# Altium PCB BABA03A_V3.0.0.PcbDoc (part 1 of 2)
Units mil, origin at the board's own origin, x right, y up, seen from the top; angles counter-clockwise.
Board outline 7913.84 x 2796.11 mil, 2 copper layers (Top Layer, Bottom Layer); 189 components, 144 nets, 645 pads, 163 vias.
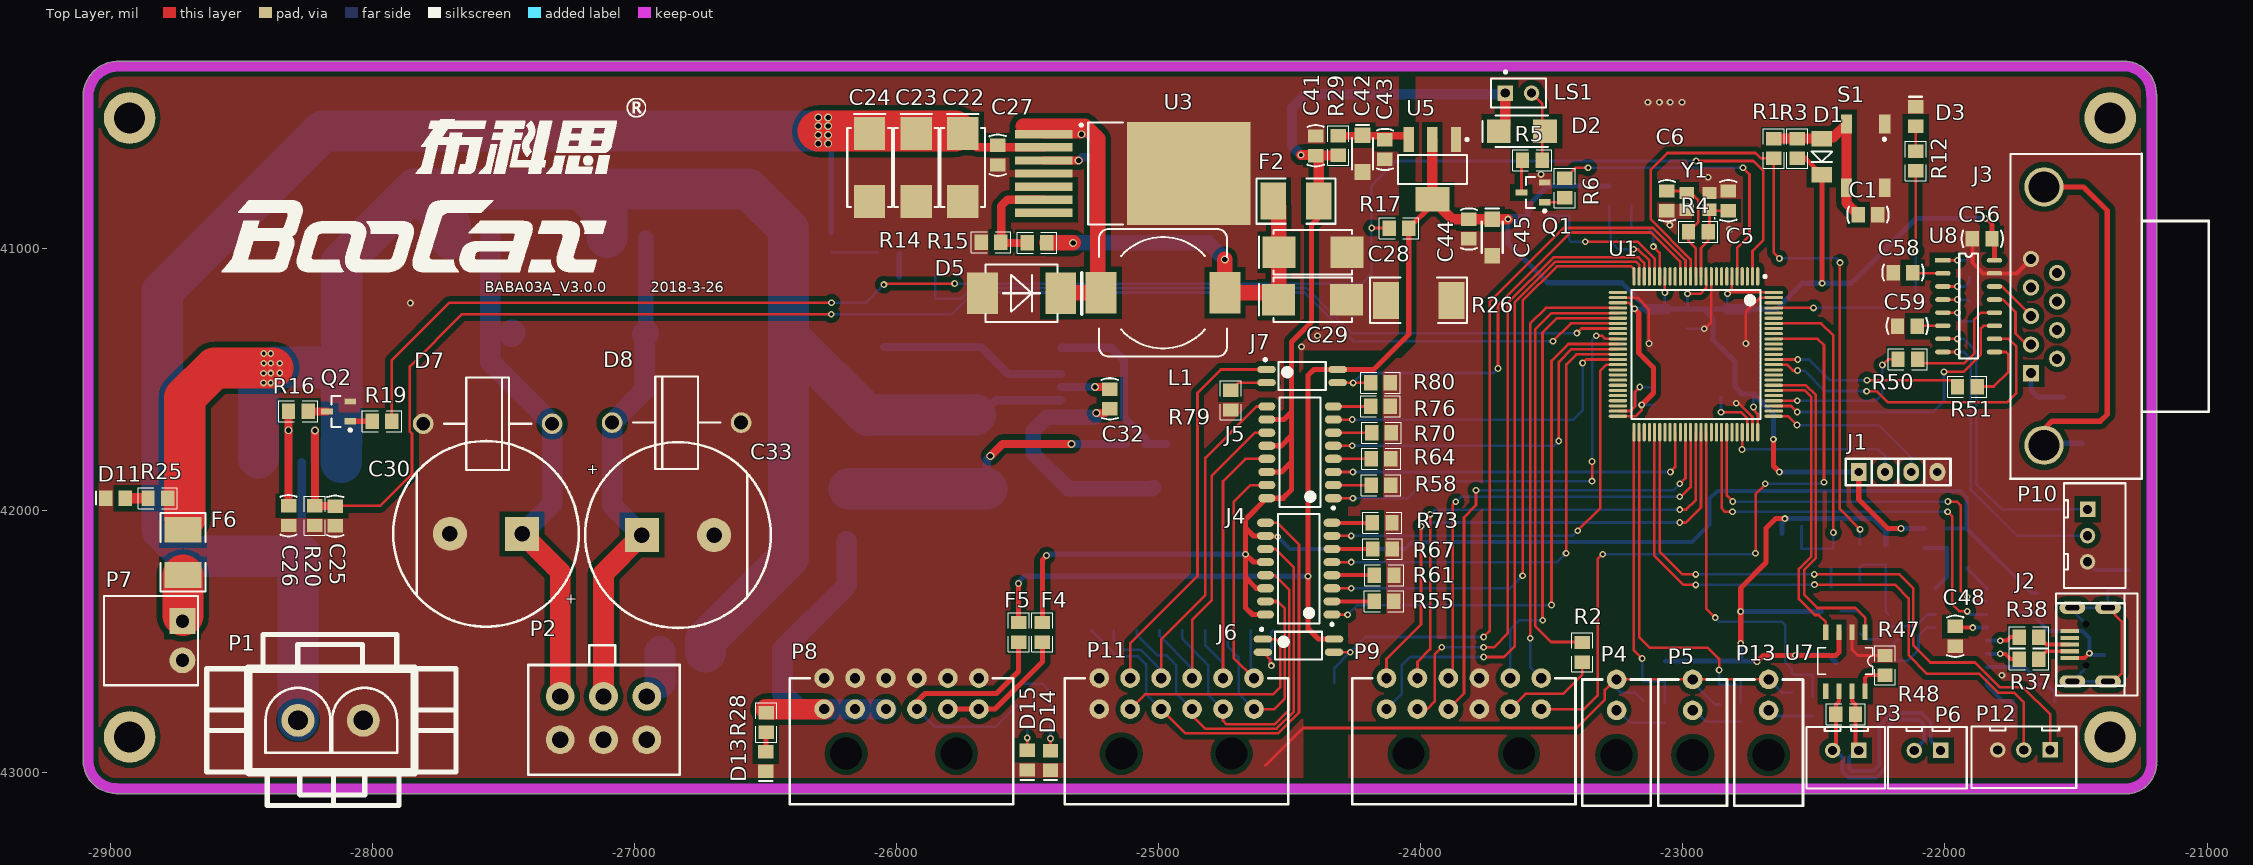
[diagram p0: Top Layer view]
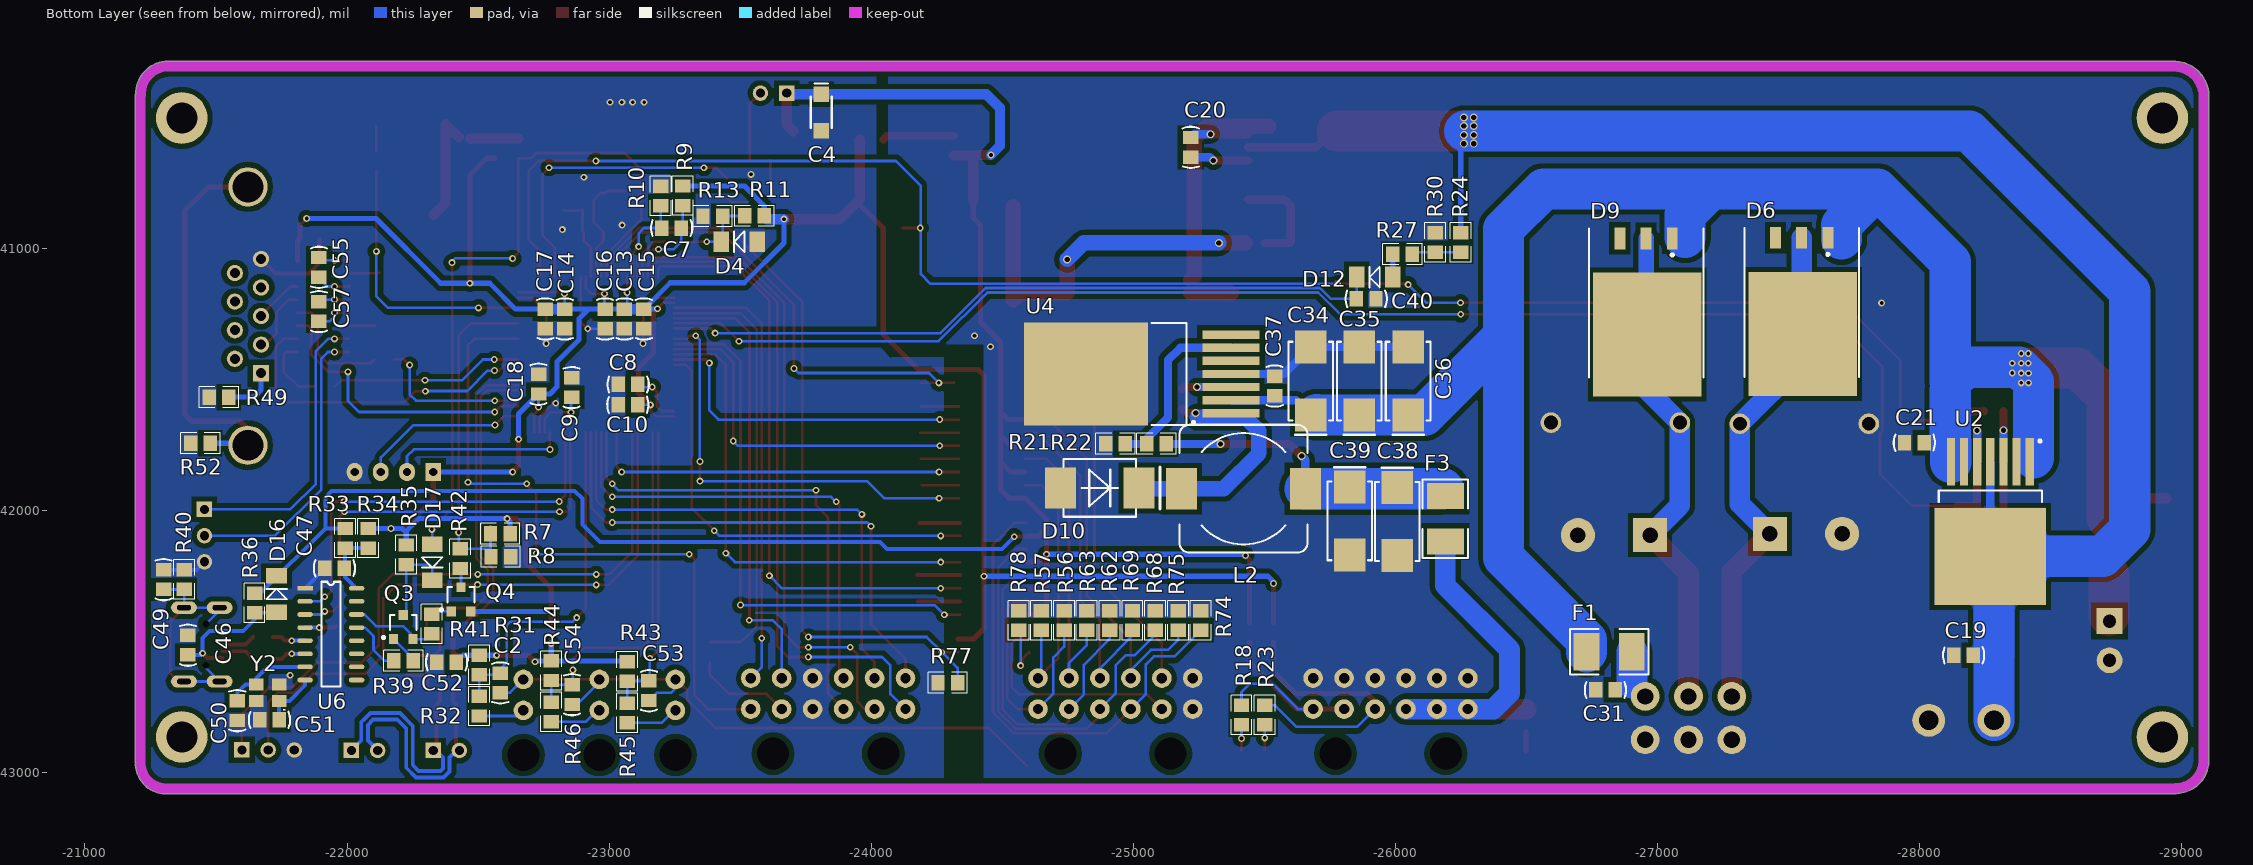
[diagram p1: Bottom Layer view, seen from below]

## Layer stack, top to bottom
Top Solder: solder mask 0.4, Solder Resist, Dk 3.5
Top Layer: signal copper 1.4
Dielectric1: prepreg 12.6, FR-4, Dk 4.8
Bottom Layer: signal copper 1.4
Bottom Solder: solder mask 0.4, Solder Resist, Dk 3.5

## Board outline
-28981.29,-43079.22 cw(c-28979.12,-42952.25) -29106.09,-42950.08 cw(c-29086.39,-42950.42) -29105.7,-42946.52 -29105.7,-40428.26 cw(c-29086.44,-40424.1) -29106.12,-40425.01 cw(c-28971.8,-40418.8) -28967.6,-40284.4 cw(c-28967.11,-40304.09) -28967.11,-40284.39 -21321.75,-40284.39 cw(c-21321.75,-40304.09) -21320.47,-40284.44 cw(c-21316.14,-40303.65) -21315.58,-40283.96 cw(c-21319.16,-40410.22) -21192.85,-40409.15 cw(c-21211.98,-40413.86) -21192.28,-40413.86 -21192.28,-42959.37 cw(c-21211.98,-42959.37) -21192.78,-42963.74 cw(c-21211.98,-42968.11) -21192.28,-42968.11 cw(c-21211.98,-42968.11) -21192.3,-42969 cw(c-21308.64,-42963.74) -21313.9,-43080.07 cw(c-21313.01,-43060.39) -21316.92,-43079.7 -28976.81,-43079.7 cw(c-28976.81,-43060) -28981.12,-43079.22 cw(c-28980.95,-43059.52)

## Design rules (kind name [scope] priority, off if disabled: settings)
Clearance Clearance_1 [InPolygon] p1: gap=20
Clearance poly [InPolygon] p2: gap=7
Clearance U5pintupin [InComponent('U5')] p3: gap=6
Clearance [All] p4: gap=7 except(20: Via-Poly Fill-Poly Poly-Poly)
ComponentClearance [All] p1 off: gap=10 collisioncheckmode=3 verticalgap=10 showdistances=FALSE
DiffPairsRouting [All] p1: maxlimit=10 minlimit=7 mostfreqgap=10 toplayer_minwidth=10 toplayer_maxwidth=15 toplayer_prefwidth=15 bottomlayer_minwidth=10 bottomlayer_maxwidth=15 bottomlayer_prefwidth=15 maxuncoupledlength=500
Height [All] p1: minheight=0 maxheight=2000 prefheight=500
HoleSize [All] p1: absolutevalues=TRUE maxlimit=500 minlimit=1 maxpercent=80.000 minpercent=20.000
HoleToHoleClearance [All] p1: gap=0 allowstackedmicrovias=TRUE
MinimumSolderMaskSliver [All] p1: minsoldermaskwidth=1
PlaneConnect [All] p1: planeconnectstyle=Direct reliefexpansion=20 reliefentries=4 reliefconductorwidth=10 reliefairgap=10
PolygonConnect G [InNet('GND')] p1: connectstyle=Direct reliefconductorwidth=10 reliefentries=4 polygonreliefangle="90 Angle" airgapwidth=10
PolygonConnect NETD4_2 [InNet('NetD4_2')] p2: connectstyle=Direct reliefconductorwidth=10 reliefentries=4 polygonreliefangle="90 Angle" airgapwidth=10
PolygonConnect NETD4 [InNet('NetC13_2')] p3: connectstyle=Direct reliefconductorwidth=10 reliefentries=4 polygonreliefangle="90 Angle" airgapwidth=10
PolygonConnect NETD3_2 [InNet('NetD3_2')] p4: connectstyle=Direct reliefconductorwidth=10 reliefentries=4 polygonreliefangle="90 Angle" airgapwidth=10
PolygonConnect RELAY_IN [InNet('RELAY_IN')] p5: connectstyle=Direct reliefconductorwidth=10 reliefentries=4 polygonreliefangle="90 Angle" airgapwidth=10
PolygonConnect VCC_24V [InNet('VCC_24V')] p6: connectstyle=Direct reliefconductorwidth=10 reliefentries=4 polygonreliefangle="90 Angle" airgapwidth=10
PolygonConnect BATTIN [InNet('BATTIN')] p7: connectstyle=Direct reliefconductorwidth=10 reliefentries=4 polygonreliefangle="90 Angle" airgapwidth=10
PolygonConnect [All] p8: connectstyle=Direct reliefconductorwidth=10 reliefentries=4 polygonreliefangle="90 Angle" airgapwidth=10
RoutingVias [All] p1: holewidth=28 width=40 viastyle="Through Hole" minholewidth=12 minwidth=26 maxholewidth=30 maxwidth=100
SilkToSilkClearance [All] p1: silktosilkclearance=0
SilkToSolderMaskClearance [IsPad] p1: minsilkscreentomaskgap=0 clearancetoexposedcopper=TRUE
SolderMaskExpansion [All] p1: expansion=4
Width [All] p1: maxlimit=500 minlimit=10 preferedwidth=30
Width Width_4 [InNet('VCC_CONTROL')] p2: maxlimit=110 minlimit=90 preferedwidth=100
Width Width_3 [InNet('VCC_B1')] p3: maxlimit=110 minlimit=90 preferedwidth=100
Width Width_2 [InNet('VCC_B')] p4: maxlimit=110 minlimit=90 preferedwidth=100
Width Width_1 [InNet('VCC_ALL')] p5: maxlimit=110 minlimit=90 preferedwidth=100
21 further rules are at their usual default settings.

## Classes and differential pairs
component class POWER: 1 C19 C20 C21 C22 C23 C24 C25 C26 C27 C28 C29 C30 C31 C32 C33 C34 C35 C36 C37 C38 C39 C40 C41 C42 C43 C44 C45 D5 D6 D7 D8 D9 D10 D11 D12 D13 F1 F2 F3 K3 L1 L2 M1 M2 M4 P1 P2 Q2 R14 R15 R16 R17 R19 R20 R21 R22 R24 R25 R26 R27 R28 R29 R30 U2 U3 U4 U5
component class MCU: C1 C4 C5 C6 C7 C8 C9 C10 C13 C14 C15 C16 C17 C18 D1 D2 D3 D4 J1 LS1 Q1 R1 R2 R3 R4 R5 R6 R7 R8 R9 R10 R11 R12 R13 S1 U1 Y1
component class CONNECTOR: C46 C47 C48 C49 C50 C51 C52 C53 C54 C55 C56 C57 C58 C59 D14 D15 D16 D17 F4 F5 F6 J2 J3 J8 J9 J10 P3 P4 P5 P6 P7 P8 P9 P10 P12 P13 Q3 Q4 R18 R23 R31 R32 R33 R34 R35 R36 R37 R38 R39 R40 R41 R42 R43 R44 R45 R46 R47 R48 R49 R50 R51 R52 U6 U7 U8 Y2 Z1 Z2
component class "Motor Control": J4 J5 J6 J7 J*1 P11 R55 R56 R57 R58 R61 R62 R63 R64 R67 R68 R69 R70 R73 R74 R75 R76 R77 R78 R79 R80
differential pair CAN: +CAN_P -CAN_N
differential pair OSC_16: +OSC_16_P -OSC_16_N
differential pair USB: +USB_P -USB_N

## Components (designator, comment, footprint, x,y, rotation, side; value= is the part's Value field where it differs from the comment)
C1 "Cap" C0805 -22294,-40870 r180 top
C2 "Cap" C0805 -22585,-42657 r270 bottom
C4 "Cap Pol1" CAP-1206 -23810,-40480 r270 bottom
C5 "Cap" C0805 -22827.12,-40817 r270 top
C6 "Cap" C0805 -23061.12,-40817 r270 top
C7 "Cap" C0805 -23239,-40921 r180 bottom
C8 "Cap" C0805 -23073,-41518 r0 bottom
C9 "Cap" C0805 -22857,-41530 r90 bottom
C10 "Cap" C0805 -23072,-41596 r0 bottom
C13 "Cap" C0805 -23059,-41268 r270 bottom
C14 "Cap" C0805 -22831,-41268 r270 bottom
C15 "Cap" C0805 -23133,-41268 r270 bottom
C16 "Cap" C0805 -22985,-41268 r270 bottom
C17 "Cap" C0805 -22757,-41268 r270 bottom
C18 "Cap" C0805 -22731,-41517 r90 bottom
C19 "Cap" C0805 -28170,-42552 r180 bottom
C20 "Cap" C0805 -25220.55,-40612.99 r270 bottom
C21 "Cap" C0805 -27982,-41740 r180 bottom
C22 "CIN" CAP-7343 -25749,-40690 r270 top
C23 "CIN" CAP-7343 -25926.87,-40690 r270 top
C24 "CIN" CAP-7343 -26104.75,-40690 r270 top
C25 "Cap" C0805 -28144,-42020.6 r270 top
C26 "Cap" C0805 -28322,-42019 r270 top
C27 "Cap" C0805 -25615.55,-40642.99 r90 top
C28 "CIN" CAP-7343 -24412.55,-41013.99 r0 top
C29 "CIN" CAP-7343 -24413.55,-41193.99 r0 top
C30 "Cap Pol1" CTH-R9-D7 -27430.41,-42088 r180 top
C31 "Cap" C0805 -26803,-42684 r0 bottom
C32 "Cap" C0805 -25187.55,-41572.99 r90 top
C33 "Cap Pol1" CTH-R9-D7 -26973.59,-42093 r0 top
C34 "CIN" CAP-7343 -25678.55,-41504.99 r90 bottom
C35 "CIN" CAP-7343 -25864.05,-41504.99 r90 bottom
C36 "CIN" CAP-7343 -26049.55,-41504.99 r90 bottom
C37 "Cap" C0805 -25540.55,-41523.99 r270 bottom
C38 "CIN" CAP-7343 -26008.55,-42040.99 r270 bottom
C39 "CIN" CAP-7343 -25827.55,-42038.99 r270 bottom
C40 "Cap" C0805 -25890,-41191 r0 bottom
C41 "Cap" C0805 -24402,-40607 r270 top
C42 "Cap Pol1" CAP-1206 -24223,-40637 r270 top
C43 "Cap" C0805 -24137.55,-40620.99 r90 top
C44 "Cap" C0805 -23817,-40924.6 r90 top
C45 "Cap Pol1" CAP-1206 -23728,-40957 r270 top
C46 "Cap" C0805 -21393,-42513 r90 bottom
C47 "Cap" C0805 -21952,-42219 r0 bottom
C48 "Cap" C0805 -21961,-42479 r270 top
C49 "Cap" C0805 -21300,-42263 r90 bottom
C50 "Cap" C0805 -21581,-42763 r270 bottom
C51 "Cap" C0805 -21704,-42798 r0 bottom
C52 "Cap" C0805 -22380,-42578 r180 bottom
C53 "Cap" C0805 -23152.55,-42686.99 r270 bottom
C54 "Cap" C0805 -22859,-42702 r270 bottom
C55 "Cap" C0805 -21893,-41071 r270 bottom
C56 "Cap" C0805 -21858,-40962 r0 top
C57 "Cap" C0805 -21893,-41240 r270 bottom
C58 "Cap" C0805 -22160.4,-41091 r0 top
C59 "Cap" C0805 -22144,-41295 r0 top
D1 "Diode" DIODE-1206 -22470,-40580.21 r270 top
D2 "Diode-Schottky" DIODE-SMA -23615,-40552 r180 top
D3 "LED0" LED_0805 -22112,-40495 r90 top
D4 "Diode-Z" DIODE-1206 -23566,-40973 r0 bottom
D5 "D Schottky" DIODE-SMC -25524.55,-41169.99 r0 top
D6 "MBR30100" TO-263-3 -27551.91,-41125 r0 bottom
D7 "TVS" DIODE -27808.13,-41668 r0 top
D8 "TVS" DIODE -26594.87,-41664 r180 top
D9 "MBR30100" TO-263-3 -26958,-41127 r0 bottom
D10 "D Schottky" DIODE-SMC -24872.95,-41912.99 r180 bottom
D11 "LED0" LED_0805 -28982,-41952 r180 top
D12 "Diode-Z" DIODE-1206 -25991,-41108 r0 bottom
D13 "LED0" LED_0805 -26500.75,-42957.08 r270 top
D14 "LED0" LED_0805 -25414,-42953 r270 top
D15 "LED0" LED_0805 -25503,-42952 r270 top
D16 "Diode" DIODE-1206 -21731,-42386.79 r90 bottom
D17 "Diode" DIODE-1206 -22325,-42128.21 r270 bottom
F1 "Fuse" 1812 -26817,-42538 r0 bottom
F2 "Fuse" 1812 -24477,-40818 r0 top
F3 "Fuse" 1812 -26192,-42030.61 r270 bottom
F4 "Fuse" 0805-1 -25445,-42464 r90 top
F5 "Fuse" 0805-1 -25536,-42464 r90 top
F6 "Fuse" 1812 -28725,-42159 r90 top
J1 "JTAG" PORT-SIP4-2.54 -22279,-41852 r0 top
J2 "USB-MICRO" USB-MICRO-1 -21445.91,-42510.75 r90 top
J3 "DB9_male" DB9-M -21672,-41475 r90 top
J4 "TLP291-4" SOIC127P700X210-16N -24466.55,-42220.99 r180 top
J5 "TLP291-4" SOIC127P700X210-16N -24461.55,-41776.99 r180 top
J6 "TLP281" SOP127P710X350-4N -24467.55,-42514.99 r0 top
J7 "TLP281" SOP127P710X350-4N -24453.55,-41485.99 r0 top
L1 "Inductor Iron" L-SMD-12 -24984.55,-41167.99 r0 top
L2 "Inductor Iron" L-SMD-12 -25421.55,-41915.99 r180 bottom
LS1 "Bell" PIN2 -23678,-40406 r0 top
P1 "POWERIN" DIP2*6.3 -28286,-42800 r0 top
P2 "Conn_2*3_4.2" PIN2X3_4.2 -26954.65,-42708.65 r270 top
P3 "Header 2" HDR2X1_B1 -22329,-42915 r180 top
P4 "Header 2" MOLEX-2P -23253.55,-42762 r0 top
P5 "Header 2" MOLEX-2P -22963,-42762 r0 top
P6 "Header 2" HDR2X1_B1 -22017,-42915 r180 top
P7 "Header 2" HDR2X1_C -28727,-42421 r270 top
P8 "Header 6X2A" Molex-12P -25687.45,-42757 r0 top
P9 "Header 6X2A" Molex-12P -23540.96,-42756.92 r0 top locked
P10 "Header 3" HDR3X1_B1 -21456,-41995 r270 top
P11 "Header 6X2A" Molex-12P -24637.37,-42756.99 r0 top
P12 "Header 3" HDR3X1_B1 -21599,-42913 r180 top
P13 "Header 2" MOLEX-2P -22673,-42762 r0 top
Q1 "BC817" SOT-23_N -23572,-40785 r180 top
Q2 "BC817" SOT-23_N -28131,-41621 r180 top
Q3 "SS8050" SOT-23 -22214.6,-42443.74 r180 bottom
Q4 "SS8550" SOT-23 -22435,-42338 r180 bottom
R1 "Res1" R0805 -22654,-40617 r90 top
R2 "Res1" R0805 -23385,-42540.4 r270 top
R3 "Res1" R0805 -22564,-40617 r270 top
R4 "Res1" R0805 -22941.4,-40936 r0 top
R5 "Res1" R0805 -23575,-40663 r180 top
R6 "Res1" R0805 -23451,-40768.6 r90 top
R7 "Res1" R0805 -22585,-42087 r0 bottom
R8 "Res1" R0805 -22587,-42175 r0 bottom
R9 "Res1" R0805 -23282,-40798 r90 bottom
R10 "Res1" R0805 -23197,-40799 r90 bottom
R11 "Res1" R0805 -23555,-40875 r180 bottom
R12 "Res1" R0805 -22112,-40665 r270 top
R13 "Res1" R0805 -23396,-40876 r180 bottom
R14 "Res1" R0805 -25640.55,-40975.99 r0 top
R15 "Res1" R0805 -25465.55,-40977.99 r0 top
R16 "Res1" R0805 -28285,-41620 r180 top
R17 "Res1" R0805 -24084,-40921 r180 top
R18 "Res1" R0805 -25414,-42780 r90 bottom
R19 "Res1" R0805 -27965,-41659 r0 top
R20 "Res1" R0805 -28222,-42019 r90 top
R21 "Res1" R0805 -24933.55,-41744.99 r180 bottom
R22 "Res1" R0805 -25089.55,-41744.99 r180 bottom
R23 "Res1" R0805 -25502,-42780 r90 bottom
R24 "Res1" R0805 -26251,-40976 r270 bottom
R25 "Res1" R0805 -28821,-41952 r0 top
R26 "Res1" 2512 -24009,-41197 r0 top
R27 "Res1" R0805 -26029,-41021 r0 bottom
R28 "Res1" R0805 -26499.75,-42808.08 r90 top
R29 "Res1" R0805 -24316.55,-40605.99 r90 top
R30 "Res1" R0805 -26154,-40976 r90 bottom
R31 "Res1" R0805 -22505,-42589 r90 bottom
R32 "Res1" R0805 -22505,-42746 r90 bottom
R33 "Res1" R0805 -21993,-42105 r270 bottom
R34 "Res1" R0805 -22081,-42105 r270 bottom
R35 "Res1" R0805 -22226,-42168 r270 bottom
R36 "Res1" R0805 -21647,-42352 r270 bottom
R37 "Res1" R0805 -21679.4,-42566 r0 top
R38 "Res1" R0805 -21679.4,-42482 r0 top
R39 "Res1" R0805 -22216,-42573 r0 bottom
R40 "RES" R0805 -21379,-42262 r270 bottom
R41 "Res1" R0805 -22323,-42432 r270 bottom
R42 "Res1" R0805 -22433,-42183 r90 bottom
R43 "Res1" R0805 -23069,-42614 r90 bottom
R44 "Res1" R0805 -22779.8,-42610.4 r90 bottom
R45 "Res1" R0805 -23070,-42772 r90 bottom
R46 "Res1" R0805 -22780,-42768 r90 bottom
R47 "Res1" R0805 -22229,-42590 r90 top
R48 "Res1" R0805 -22379,-42777 r180 top
R49 "Res1" R0805 -21511,-41566 r180 bottom
R50 "Res1" R0805 -22142,-41422 r180 top
R51 "Res1" R0805 -21915,-41526 r180 top
R52 "Res1" R0805 -21441,-41742 r180 bottom
R55 "Res1" R0805 -24141,-42346 r0 top
R56 "Res1" R0805 -24737,-42418.4 r90 bottom
R57 "Res1" R0805 -24650,-42418.4 r90 bottom
R58 "Res1" R0805 -24153,-41902 r0 top
R61 "Res1" R0805 -24140.45,-42245.99 r0 top
R62 "Res1" R0805 -24911,-42418.4 r90 bottom
R63 "Res1" R0805 -24824,-42418.4 r90 bottom
R64 "Res1" R0805 -24152,-41802 r0 top
R67 "Res1" R0805 -24146.45,-42145.99 r0 top
R68 "Res1" R0805 -25085,-42418.4 r90 bottom
R69 "Res1" R0805 -24998,-42418.4 r90 bottom
R70 "Res1" R0805 -24151,-41702 r0 top
R73 "Res1" R0805 -24148,-42046 r0 top
R74 "Res1" R0805 -25259,-42418.4 r90 bottom
R75 "Res1" R0805 -25172,-42418.4 r90 bottom
R76 "Res1" R0805 -24155,-41602 r0 top
R77 "Res1" R0805 -24293,-42656 r180 bottom
R78 "Res1" R0805 -24564,-42419 r90 bottom
R79 "Res1" R0805 -24726,-41578 r270 top
R80 "Res1" R0805 -24154,-41511 r0 top
S1 "SW-PB4" RESET-SMD-1O4 -22303,-40646 r270 top
U1 "STM32F407VG" 100T1_N -22951,-41403 r270 top locked
U2 "BTS50085-1TMA" TO127P1385X450-8N-V -28272,-41993.88 r270 bottom
U3 "LM2678_ADJ" TO-263-7 -25166.55,-40712.99 r0 top
U4 "LM2678_ADJ" TO-263-7 -25100.55,-41477.99 r0 bottom
U5 "ASM1117-3V3" ASM1117-3V3 -23956.55,-40696.99 r270 top
U6 "CH340G" SOP16 -21840,-42296 r180 bottom
U7 "SN65HVD230" SO8-SN65HVD230 -22380,-42576 r180 top
U8 "MAX3232ESE" SOP16 -22008,-41044 r0 top
Y1 "XTAL-4PIN" EPSON-16M -22942.12,-40819 r180 top
Y2 "XTAL-4PIN" EPSON-16M -21697.69,-42694.5 r0 bottom

## Footprints (in the part's own frame and the unit in brackets; to place one, negate y for a bottom-side part, rotate by r counter-clockwise, add the part's x,y. Pads: shape width x height; smd on the part's side, far side on the other; paste and mask are expansions set on the pad)
100T1_N [mm] "Thin QFP, 100-Leads, Body 14x14mm, Pitch 0.5mm, IPC Medium Density"
  oval 1.8x0.3 smd: 1(-7.55,6) 2(-7.55,5.5) 3(-7.55,5) 4(-7.55,4.5) 5(-7.55,4) 6(-7.55,3.5) 7(-7.55,3) 8(-7.55,2.5) 9(-7.55,2) 10(-7.55,1.5) 11(-7.55,1) 12(-7.55,0.5) 13(-7.55,0) 14(-7.55,-0.5) 15(-7.55,-1) 16(-7.55,-1.5) 17(-7.55,-2) 18(-7.55,-2.5) 19(-7.55,-3) 20(-7.55,-3.5) 21(-7.55,-4) 22(-7.55,-4.5) 23(-7.55,-5) 24(-7.55,-5.5) 25(-7.55,-6) 51(7.55,-6) 52(7.55,-5.5) 53(7.55,-5) 54(7.55,-4.5) 55(7.55,-4) 56(7.55,-3.5) 57(7.55,-3) 58(7.55,-2.5) 59(7.55,-2) 60(7.55,-1.5) 61(7.55,-1) 62(7.55,-0.5) 63(7.55,0) 64(7.55,0.5) 65(7.55,1) 66(7.55,1.5) 67(7.55,2) 68(7.55,2.5) 69(7.55,3) 70(7.55,3.5) 71(7.55,4) 72(7.55,4.5) 73(7.55,5) 74(7.55,5.5) 75(7.55,6)
  oval 0.3x1.8 smd: 26(-6,-7.55) 27(-5.5,-7.55) 28(-5,-7.55) 29(-4.5,-7.55) 30(-4,-7.55) 31(-3.5,-7.55) 32(-3,-7.55) 33(-2.5,-7.55) 34(-2,-7.55) 35(-1.5,-7.55) 36(-1,-7.55) 37(-0.5,-7.55) 38(0,-7.55) 39(0.5,-7.55) 40(1,-7.55) 41(1.5,-7.55) 42(2,-7.55) 43(2.5,-7.55) 44(3,-7.55) 45(3.5,-7.55) 46(4,-7.55) 47(4.5,-7.55) 48(5,-7.55) 49(5.5,-7.55) 50(6,-7.55) 76(6,7.55) 77(5.5,7.55) 78(5,7.55) 79(4.5,7.55) 80(4,7.55) 81(3.5,7.55) 82(3,7.55) 83(2.5,7.55) 84(2,7.55) 85(1.5,7.55) 86(1,7.55) 87(0.5,7.55) 88(0,7.55) 89(-0.5,7.55) 90(-1,7.55) 91(-1.5,7.55) 92(-2,7.55) 93(-2.5,7.55) 94(-3,7.55) 95(-3.5,7.55) 96(-4,7.55) 97(-4.5,7.55) 98(-5,7.55) 99(-5.5,7.55) 100(-6,7.55)
  silkscreen extent -7.67,-6.25 6.25,6.83, body extent -7,-7 7,7, height 1.05
0805-1 [mm] "贴片带丝印"
  rect 1.3x1.5 smd: 1(-0.95,0) 2(0.95,0)
  silkscreen extent -1.91,-1.02 1.91,1.02, body extent -1.14,-0.51 1.14,0.51, height 1
1812 [mm] "保险丝"
  rect 2.5x3.6 smd: 1(-2.2,0) 2(2.2,0)
  silkscreen extent -3.81,-2.2 3.81,2.2, body extent -2.54,-1.65 2.67,1.65, height 1.2
2512 [mm] "贴片元件"
  rect 2.5x3.6 smd: 1(-3.175,0) 2(3.175,0)
  silkscreen extent -4.7,-2.2 4.7,2.2, body extent -3.17,-1.65 3.17,1.65, height 1.2
ASM1117-3V3 [mm]
  rect 2.4x1 smd: 1(-2.9,2.3) 2(-2.9,0) 3(-2.9,-2.3)
  rect 2.4x3.3 smd: 4(2.9,0)
  silkscreen extent -3.02,-3.35 1.4,3.48, body extent -1.85,-3.35 1.85,3.35, height 1.7
C0805 [mm] "贴片电容0805"
  rect 1.3x1.5 smd: 1(-0.95,0) 2(0.95,0)
  silkscreen extent -2,-0.79 2,0.79, body extent -1.27,-0.64 1.27,0.64, height 0.9
CAP-1206 [mil] "贴片元件"
  rect 60x60 smd: 1(-70,0) 2(70,0)
  silkscreen extent -110,-40 60,40, body extent -65,-35 65,35, height 39
CAP-7343 [mm] "钽电容"
  rect 3.2x3.05 smd: 1(-3.302,0) 2(3.302,0)
  silkscreen extent -5.21,-2.16 3.81,2.16, body extent -3.68,-1.91 3.68,1.91, height 2.95
CTH-R9-D7 [mm] "直插电解电容引脚间距7mm半径9mm"
  rect 3.3x3.3 hole 1.5: 1(0,0)
  round 3.3 hole 1.5: 2(7,0)
  silkscreen extent -5.5,-9 12.5,9, body extent -5.49,-9 12.51,9, height 28.7
DB9-M [mil] "DB9公座"
  rect 62x62 hole 38: 1(0,0)
  round 62 hole 38: 2(109,0) 3(218,0) 4(327,0) 5(436,0) 6(55,-100) 7(164,-100) 8(273,-100) 9(382,-100)
  round 150 hole 118.11: 10(711,-50) 11(-275,-50)
  silkscreen extent -404,-679 837,79, body extent -405,-680 835,75, height 394
DIODE [mm] "43V30KW"
  round 2 hole 1.35: 1(0,0) 2(12.5,0)
  silkscreen extent 2,-4.5 10.5,4.5
DIODE-1206 [mm] "玻璃封装二极管"
  rect 1.5x2 smd: 1(0,0) 2(3.5,0)
  silkscreen extent 1.25,-1 2.25,1
DIODE-SMA [mm] "贴片二极管"
  rect 2.3x2.3 smd: 1(-2.25,0) 2(2.25,0)
  silkscreen extent -2.54,-1.52 3.81,1.52, body extent -2.92,-1.4 2.92,1.4, height 3
DIODE-SMC [mm] "贴片二极管"
  rect 3x4 smd: 1(-3.8,0) 2(3.8,0)
  silkscreen extent -3.5,-2.79 5.84,2.79, body extent -3.81,-2.79 3.94,2.79, height 1.05
DIP2*6.3 [mm]
  round 3.2 hole 1.9: 1(0,0) 2(6.327,0)
  silkscreen extent -8.85,-8.25 15.3,8.33
EPSON-16M [mm] "晶振 3.2*2.5mm"
  rect 1.4x1.2 smd: 1(-1.1,0.8) 2(-1.1,-0.8) 3(1.1,-0.8) 4(1.1,0.8)
  silkscreen extent -1.65,1.6 -1.55,1.7, body extent -1.6,-1.25 1.6,1.25, height 0.7
HDR2X1_B1 [mm] "Connector; Header; 4 Position"
  rect 1.5x1.5 hole 0.9: 1(0,0)
  round 1.5 hole 0.9: 2(2.54,0)
  silkscreen extent -2.54,-2.29 5.08,3.68, body extent -2.41,-2.16 5.08,3.56, height 1.5
HDR2X1_C [mm] "3.81接插件"
  rect 2.5x2.5 hole 1.3: 1(0,0)
  round 2.5 hole 1.3: 2(3.81,0)
  silkscreen extent -2.41,-7.62 6.22,1.5, body extent -2.41,-7.62 6.22,1.4, height 5
HDR3X1_B1 [mm] "Connector; Header; 3 Position"
  rect 1.5x1.5 hole 0.9: 1(0,0)
  round 1.5 hole 0.9: 2(2.54,0) 3(5.08,0)
  silkscreen extent -2.54,-2.29 7.62,3.68, body extent -2.54,-2.29 7.62,3.68, height 1.5
L-SMD-12 [mm] "贴片电感12*12"
  rect 3x4 smd: 1(-6,0) 2(6,0)
  silkscreen extent -6.2,-6.2 6.2,6.2, body extent -6.2,-6.22 6.2,6.17, height 2.5
LED_0805 [mm] "贴片二极管"
  rect 1.3x1.5 smd: 1(-0.95,0) 2(0.95,0)
  silkscreen extent 1.91,-0.63 1.91,0.64
MOLEX-2P [mm]
  round 0 hole 3.1: 0(0,-4.32)
  round 1.9 hole 1: 1(0,0) 2(0,3)
  silkscreen extent -3.32,-9.24 3.32,3, body extent -3.33,-9.22 3.33,0, height 7.37
Molex-12P [mm]
  round 0 hole 3.1: 0(-12.86,-4.32) 0(-2.16,-4.32)
  round 1.9 hole 1: 1(0,0) 2(-3,0) 3(-6,0) 4(-9,0) 5(-12,0) 6(-15,0) 7(0,3) 8(-3,3) 9(-6,3) 10(-9,3) 11(-12,3) 12(-15,3)
  silkscreen extent -18.34,-9.24 3.32,3, body extent -18.34,-9.25 3.33,0, height 7.37
PIN2 [mm] "Photosensitive Diode; 2 Leads"
  rect 1.5x1.5 hole 0.9: 1(0,0)
  round 1.5 hole 0.9: 2(2.54,0)
  silkscreen extent -1.4,-1.4 3.94,2.17
PIN2X3_4.2 [mil]
  round 110 hole 62: 1(0,0) 2(0,-165.35) 3(0,-330.71) 4(165.35,-330.71) 5(165.35,-165.35) 6(165.35,0)
  silkscreen extent -195,-452 299,125, body extent -120,-455 300,125, height 500
PORT-SIP4-2.54 [mil]
  rect 60x70 hole 32: 1(-50,0)
  oval 60x70 hole 32: 2(50,0) 3(150,0) 4(250,0)
  silkscreen extent -100,-50 300,50
R0805 [mm] "贴片带丝印"
  rect 1.3x1.5 smd: 1(-0.95,0) 2(0.95,0)
  silkscreen extent -1.91,-1.02 1.91,1.02, body extent -1.14,-0.51 1.14,0.51, height 1
RESET-SMD-1O4 [mm]
  rect 1.8x1.1 smd: 1(-3.1,1.85) 2(-3.1,-1.85) 3(3.1,-1.85) 4(3.1,1.85)
  silkscreen extent -1.75,1.7 -1.5,1.95, body extent -4.07,-2.52 4.11,2.42, height 1.1
SO8-SN65HVD230 [mil]
  rect 20x60 smd: 1(-75,-112.5) 2(-25,-112.5) 3(25,-112.5) 4(75,-112.5) 5(75,112.5) 6(25,112.5) 7(-25,112.5) 8(-75,112.5)
  silkscreen extent -105,-53 105,48
SOIC127P700X210-16N [mm] "SOIC, 16-Leads, Body 10.35x4.60mm, Pitch 1.27mm, IPC Medium Density"
  oval 1.65x0.8 smd: 1(-3.225,4.445) 2(-3.225,3.175) 3(-3.225,1.905) 4(-3.225,0.635) 5(-3.225,-0.635) 6(-3.225,-1.905) 7(-3.225,-3.175) 8(-3.225,-4.445) 9(3.225,-4.445) 10(3.225,-3.175) 11(3.225,-1.905) 12(3.225,-0.635) 13(3.225,0.635) 14(3.225,1.905) 15(3.225,3.175) 16(3.225,4.445)
  silkscreen extent -3.35,-5.3 2,5.52, body extent -2.4,-5.3 2.4,5.3, height 2.1
SOP16 [mm]
  rect 1.5x0.45 smd: 1(0,0)
  oval 1.5x0.45 smd: 2(0,-1.27) 3(0,-2.54) 4(0,-3.81) 5(0,-5.08) 6(0,-6.35) 7(0,-7.62) 8(0,-8.89) 9(5,-8.89) 10(5,-7.62) 11(5,-6.35) 12(5,-5.08) 13(5,-3.81) 14(5,-2.54) 15(5,-1.27) 16(5,0)
  silkscreen extent 1.58,-9.53 3.42,0.63, body extent 0.89,-9.4 4.19,0.51, height 1.8
SOP127P710X350-4N [mm] "SOP, 4-Leads, Body 2.7x4.5mm (max), Pitch 1.27mm, IPC Medium Density"
  oval 1.8x0.7 smd: 1(-3.448,0.635) 2(-3.448,-0.635) 3(3.448,-0.635) 4(3.448,0.635)
  silkscreen extent -3.7,-1.35 2.29,1.71, body extent -2.76,-1.35 2.79,1.35, height 3.5
SOT-23 [mm]
  rect 0.9x0.95 smd: 1(-0.95,-1.175) 2(0.95,-1.175) 3(0,1.175)
  silkscreen extent -2.03,-1.14 1.3,1.18
SOT-23_N [mm] "SOT23, 3-Leads, Body 2.9x1.3mm, Pitch 0.95mm, Lead Span 2.5mm, IPC Medium Density"
  rect 1.15x0.6 smd: 1(-1.125,0.95) 2(-1.125,-0.95) 3(1.125,0)
  silkscreen extent -1.25,-1.5 0.7,1.92, body extent -0.7,-1.5 0.7,1.5, height 1.1
TO127P1385X450-8N-V [mm] "TO,1.27mm pitch;7 pin,13.85mm L X 9.25mm W X 4.50mm H body"
  rect 4.6x0.8 smd paste+0 mask+0: 1(-4.575,3.81) 2(-4.575,2.54) 3(-4.575,1.27) 4(-4.575,0) 5(-4.575,-1.27) 6(-4.575,-2.54) 7(-4.575,-3.81)
  rect 9.4x10.8 smd paste+0 mask+0: 8(4.575,0)
  silkscreen extent -6.72,-5 -0.7,5, body extent -5.72,-5 8.13,5, height 4.51
TO-263-3 [mm] "LM2940/LM1086"
  rect 1.05x2.1 smd: 1(-2.54,-4.225) 2(0,-4.225) 3(2.54,-4.225)
  rect 10.5x12 smd: 2(-0.104,5.08)
  silkscreen extent -5.55,-5.17 5.55,9.28, body extent -5.33,-4.7 5.33,9.27, height 1.6
TO-263-7 [mm] "TO, 8-Pads,7970"
  rect 5.55x0.8 smd: 1(-6.943,3.81) 2(-6.943,2.54) 3(-6.943,1.27) 4(-6.943,0) 5(-6.943,-1.27) 6(-6.943,-2.54) 7(-6.943,-3.81)
  rect 12x10 smd: 8(7.112,0)
  silkscreen extent -3.42,-4.95 0.75,4.95
USB-MICRO-1 [mm]
  oval 1.2x2.5 hole 0.5 slot 1.35 at 90 deg: 0(-3.575,-1.725) 0(-3.575,1.725) 0(3.575,-1.725) 0(3.575,1.725)
  round 0 hole 0.65: 0(-2,0.4) 0(2,0.4)
  rect 0.4x1.824 smd: 1(-1.3,1.987) 2(-0.65,1.987) 3(0,1.987) 4(0.65,1.987) 5(1.3,1.987)
  silkscreen extent -4.95,-4.6 4.95,3.3

## Part data
C1 C2 C5 C6 C7 C8 C9 C10 C13 C14 C15 C16 C17 C18 C19 C20 C21 C25 C26 C31 C32 C40 C41 C43 C44 C46 C47 C48 C49 C50 C51 C52 C53 C54 C55 C56 C57 C58 C59: "Capacitor"
C4 C30 C33 C42 C45: "Polarized Capacitor (Radial)"
C22 C23 C24 C28 C29 C34 C35 C36 C38 C39: library part "Cap Pol1", "Polarized Capacitor (Radial)"
C27 C37: "CC"
D1 D16 D17: "二极管"
D2: "肖特基二极管"
D3 D11 D13 D14 D15: "发光二极管"
D4 D12: "稳压二极管"
D5 D10: "Schottky Diode"
D6 D9: "Dual Diode"
D7 D8: "TVS保护"
F1 F2 F3 F4 F5 F6: library part "Fuse 2", "保险丝"
J1: library part Conn_1*4_1
J3: library part "D Connector 9", "串口"
J4 J5 J6 J7: "光耦"
L1 L2: "Magnetic-Core Inductor"
LS1: "Electrical Bell"
P1: library part "Header 2", "Conn6.3_1*2"
P3 P4 P5 P6 P7 P10 P12 P13: "接插件"
P8 P9 P11: "Header, 6-Pin, Dual row"
Q1 Q2: library part mNPN, "NPN 45V 功耗 310mW"
Q3: "NPN贴片三极管"
Q4: "PNP贴片三极管"
R1 R2 R3 R4 R5 R6 R7 R8 R9 R10 R11 R12 R13 R14 R15 R16 R17 R18 R19 R20 R21 R22 R23 R24 R25 R26 R27 R28 R29 R30 R31 R32 R35 R39 R41 R42 R43 R44 R45 R46 R47 R48 R49 R50 R51 R52 R55 R56 R57 R58 R61 R62 R63 R64 R67 R68 R69 R70 R73 R74 R75 R76 R77 R78 R79 R80: "Resistor"
R33 R34 R36 R37 R38: library part RES
S1: "微动开关"
U2: "Smart Highside High Current Power Switch, VBB 70V"
U3 U4: library part LM2678
U5: library part LDO
U7: library part SN65HVD230D
U8: "+5V Powered, Multi-Channel RS-232 Driver/Receiver"

## Free pads (board coordinates)
  round 196.85 hole 118.11: 0(-28928.52,-42863.15) 0(-28928.52,-40500.94) 0(-21369.46,-42863.15) 0(-21369.46,-40500.94)

## Via types
v1: diameter 26, hole 14, Top Layer to Bottom Layer, tented both sides, 145 vias
v2: diameter 30, hole 20, Top Layer to Bottom Layer, tented both sides, 18 vias

## Nets (pads, with @x,y where several pads share a name; then routed paths per layer and width w, separated by ;. In a path a pad name is that pad's centre, name@x,y a point inside that pad or via, vN(x,y) a via of type N, cw(c..) or ccw(c..) an arc to the next point about the centre after c; other vN are vias at no path point)
AGND: C2.2 C19.1 C21.1 C22.2 C23.2 C24.2 C25.2 C26.2 C27.1 C28.2 C29.2 C30.2 C31.2 C33.2 C34.2 C35.2 C36.2 C37.1 C38.2 C39.2 C40.1 C41.1 C42.2 C43.1 C53.2 C54.2 D5.1 D7.1 D8.1 D10.1 D11.2 D13.2 D14.2 D15.2 P1.2 P2.4 P2.5 P2.6 P4.2 P5.2 P7.2 P8.7 P8.8 P8.9 P8.10 P8.11 P8.12 P11.6 P11.12 P13.2 Q2.2 R14.1 R20.1 R21.1 R26.1 R30.2 R56.2 R57.2 R62.2 R63.2 R68.2 R69.2 R74.2 R75.2 R78.2 R79.2 U3.4 U3.8 U4.4 U4.8 | length 3217.7
  Top Layer w10: -24594,-42972 -24451,-42829 -23406,-42829 -23298,-42721 -23298,-42683.33 -23253.55,-42638.88 -23249.54,-42642.89 -22674,-42642.89 P13.2@-22673,-42643.89
  Bottom Layer w10: P4.2@-23253.55,-42638.88 P4.2@-23253.55,-42643.89 -23253.55,-42678.45 -23238,-42694 -23182.95,-42694 C53.2@-23152.55,-42724.39 ; P5.2@-22955,-42642.89 -22955,-42663 -22878.6,-42739.4 C54.2@-22859,-42739.4 ; P13.2@-22673,-42643.89 -22622.49,-42694.4 C2.2@-22585,-42694.4
  Bottom Layer w31.5: C36.2@-26049.55,-41374.99 C35.2@-25864.05,-41374.99 C34.2@-25678.55,-41374.99 -25575.55,-41477.99 U4.4@-25373.9,-41477.99
  other v1: -24456,-41374 -24395,-41332 -27857,-41207
B-STOP: C2.1 R31.1 R32.2 U1.65 | length 1359.1
  Top Layer w10: U1.65@-22911.63,-41700.24 -22911.63,-42373.37 v1(-22877,-42408)
  Bottom Layer w10: v1(-22877,-42408) -22861,-42424 -22623,-42424 -22609,-42438 -22609,-42580 -22585,-42604 C2.1@-22585,-42619.6 -22578.2,-42626.4 R31.1@-22505,-42626.4 R32.2@-22505,-42708.6
BELL_CONTROL: R6.2 U1.5 | length 1141.4
  Top Layer w10: R6.2@-23451,-40731.2 -23410.8,-40691 v1(-23362,-40691) ; U1.5@-22793.52,-41105.76 -22793.52,-40997.52 -22746,-40950 -22746,-40716 v1(-22771,-40691)
  Bottom Layer w10: v1(-23362,-40691) v1(-22771,-40691)
BK_L: J4.1 U1.36 | length 2065.7
  Top Layer w10: J4.1@-24339.58,-42395.99 -24338.58,-42397 v1(-24280,-42397) ; v1(-23502,-42360) -23502,-41428 -23437.63,-41363.63 U1.36@-23248.24,-41363.63
  Bottom Layer w10: v1(-24280,-42397) -24243,-42360 v1(-23502,-42360)
BK_OUT_L: J4.15 P11.1 R56.1 | length 905.4
  Top Layer w10: P11.1@-24637.37,-42756.99 -24559.55,-42756.99 -24519.55,-42716.99 -24519.55,-42373.99 -24547.55,-42345.99
  Top Layer w15: J4.15@-24593.52,-42345.99 -24547.55,-42345.99
  Bottom Layer w10: R56.1@-24737,-42455.8 -24737,-42519 -24696,-42560 -24696,-42698.36 P11.1@-24637.37,-42756.99
BK_OUT_R: J5.15 P11.7 R57.1 | length 1056.6
  Top Layer w10: P11.7@-24637.37,-42638.88 -24715,-42561.25 -24715,-41966 -24650.99,-41901.99 J5.15@-24588.52,-41901.99
  Bottom Layer w10: R57.1@-24650,-42455.8 -24650,-42626.25 P11.7@-24637.37,-42638.88 P11.7@-24637.37,-42628.63
BK_R: J5.1 U1.35 | length 1663.8
  Top Layer w10: J5.1@-24334.58,-41951.99 v1(-24260,-41952) ; v1(-23347,-41887) v1(-23347,-41812) ; v1(-23331,-41332) -23309,-41332 -23297.06,-41343.94 U1.35@-23248.24,-41343.94
  Bottom Layer w10: v1(-24260,-41952) -24050,-41952 -23985,-41887 v1(-23347,-41887) ; v1(-23347,-41812) -23347,-41348 v1(-23331,-41332)
BLDC_24V: C30.1 D6.2 D7.2 P2.3 | length 1961
  Top Layer w78.74: C30.1@-27430.41,-42088 -27285.35,-42233.06 P2.3@-27285.35,-42708.65
  Bottom Layer w78.74: D6.2@-27551.91,-40958.66 -27551.91,-41432.09 D7.2@-27316,-41668 -27316,-41973.59 C30.1@-27430.41,-42088
  Bottom Layer w100: D6.2@-27472.09,-41325 D6.2@-27468,-41320.91
BOOT0: R7.2 R8.2 R42.2 U1.94 | length 1263.8
  Top Layer w10: U1.94@-22653.76,-41284.89 -22473.11,-41284.89 -22426,-41332 v1(-22426,-42083)
  Bottom Layer w10: -22547.6,-42145 R7.2@-22547.6,-42087 R7.2@-22547.6,-42059 ; R8.2@-22547,-42145.6 R42.2@-22433,-42145.6 -22426,-42138.6 v1(-22426,-42083)
BUTTON: C53.1 R43.1 R45.2 U1.51 | length 1126.7
  Top Layer w10: U1.51@-23187.22,-41700.24 -23187.22,-42532.78 v1(-23156,-42564)
  Bottom Layer w10: C53.1@-23156,-42646.14 v1(-23156,-42564) ; C53.1@-23152.55,-42649.59 -23070.81,-42649.59 R43.1@-23069,-42651.4 -23069,-42733.6 R45.2@-23070,-42734.6
CAN1_RX: U1.81 U7.4 | length 1122.6
  Top Layer w10: U1.81@-22653.76,-41540.8 -22535.2,-41540.8 -22510,-41566 -22510,-42173.96 -22557.52,-42221.48 -22557.52,-42337.48 -22497,-42398 -22482,-42398 -22455,-42425 U7.4@-22455,-42463.5
CAN1_TX: U1.82 U7.1 | length 1280.2
  Top Layer w10: U1.82@-22653.76,-41521.11 -22530.85,-41521.11 -22493,-41558.96 -22493,-42181 -22537,-42225 -22537,-42321 -22487,-42371 -22342,-42371 -22305,-42408 U7.1@-22305,-42463.5
CAN_N: P3.2 P6.2 R48.2 U7.6 | length 978.2
  Top Layer w15: P3.2@-22446.68,-42915.32 P3.2@-22434.08,-42902.72 ; P3.2@-22429,-42915 -22416.4,-42902.4 R48.2@-22416.4,-42777 -22416.4,-42739.97 -22405,-42728.57 U7.6@-22405,-42688.5
  Bottom Layer w15: P3.2@-22429,-42915 -22419,-42915 -22391.5,-42942.5 -22391.5,-42994.53 -22367.71,-43018.32 -22263.32,-43018.32 -22226,-42981 -22226,-42831.36 -22191.64,-42797 -22099.5,-42797 -22079.5,-42817 -22079.5,-42877.5 P6.2@-22117,-42915
CAN_P: P3.1 P6.1 R48.1 U7.7 | length 961.2
  Top Layer w15: U7.7@-22355,-42688.5 -22355,-42726.57 -22341.6,-42739.97 R48.1@-22341.6,-42777 -22341.6,-42902.4 P3.1@-22329,-42915
  Bottom Layer w15: P3.1@-22329,-42915 -22339,-42915 -22366.5,-42942.5 -22366.5,-42984.18 -22357.36,-42993.32 -22273.68,-42993.32 -22251,-42970.64 -22251,-42821 -22202,-42772 -22089.14,-42772 -22064.57,-42796.57 -22054.5,-42806.64 -22054.5,-42877.5 P6.1@-22017,-42915
DGND: C1.1 C4.2 C5.1 C6.2 C8.2 C9.2 C10.2 C13.2 C14.2 C15.2 C16.2 C17.2 C18.2 C44.1 C45.2 C46.2 C47.2 C48.2 C49.2 C50.2 C51.2 C52.1 C56.1 C58.1 C59.1 D3.2 D4.1 J1.4 J2.5 J3.5 P9.3 P9.9 P10.3 P12.3 Q1.2 R8.1 R10.2 R13.1 R26.2 R40.1 R47.2 R49.1 R52.1 R55.2 R58.2 R61.2 R64.2 R67.2 R70.2 R73.2 R76.2 R77.1 R80.2 S1.1 S1.4 U1.10 U1.27 U1.74 U1.99 U5.1 U6.1 U7.2 U8.15 Y1.2 Y1.4 Y2.2 Y2.4 | length 1771.4
  Top Layer w10: U1.27@-23248.24,-41186.46 -23174.54,-41186.46 -23130,-41231 v1(-23130,-41362) ; v1(-22918.6,-41305.4) -22918,-41306 -22891.94,-41279.94 U1.10@-22891.94,-41105.76 ; v1(-22797,-41590) -22787,-41590 -22734.46,-41642.54 U1.74@-22734.46,-41700.24 ; v1(-22760,-41362) -22760,-41240 -22706.46,-41186.46 U1.99@-22653.76,-41186.46 ; U7.2@-22355,-42463.5 -22355,-42530 -22332.4,-42552.6 R47.2@-22229,-42552.6
  Top Layer w15: C56.1@-21895.4,-40962 -21895.4,-41053.6 -21855,-41094 U8.15@-21811.15,-41094 -21727,-41094 J3.5@-21672,-41039
  Bottom Layer w10: C16.2@-22985,-41305.4 v1(-22918.6,-41305.4)
  Bottom Layer w15: C47.2@-21914.6,-42219 -21914.6,-42221.4 U6.1@-21840,-42296 ; P10.3@-21456,-42195 -21425.4,-42225.6 C49.2@-21300,-42225.6
  other v1: -21783,-42628 -22822,-40927 -23050,-40910 -22904,-40727 -23542,-40716.1 -23134,-40441 -23090,-40441 -23049,-40441 -23004,-40441
E-STOP: C54.1 R44.1 R46.2 U1.52 | length 1367.2
  Top Layer w10: U1.52@-23167.54,-41700.24 -23167.54,-42481.46 -23126,-42523 -22905,-42523 -22862,-42566 v1(-22862,-42608)
  Bottom Layer w10: v1(-22862,-42608) -22862,-42661.6 C54.1@-22859,-42664.6 R44.1@-22796.6,-42664.6 ; R46.2@-22779.8,-42731 R44.1@-22779.8,-42647.8
EN_L: J4.5 U1.38 | length 1841.6
  Top Layer w10: J4.5@-24339.58,-42195.99 v1(-24265.99,-42195.99) ; v1(-23446,-42162) -23445,-42161 -23445,-41441 -23407,-41403 U1.38@-23248.24,-41403
  Bottom Layer w10: v1(-24265.99,-42195.99) -23479.99,-42195.99 v1(-23446,-42162)
EN_OUT_L: J4.11 P11.3 R68.1 | length 1556.1
  Top Layer w10: P11.3@-24873.59,-42756.99 -24873.59,-42781.96 -24823.55,-42831.99 -24551.55,-42831.99 -24485.55,-42765.99 -24485.55,-42215.99 -24555.55,-42145.99 J4.11@-24593.52,-42145.99
  Bottom Layer w10: R68.1@-25085,-42455.8 -25085,-42473 -25007,-42551 -24974,-42551 -24934,-42591 -24934,-42696.58 P11.3@-24873.59,-42756.99
EN_OUT_R: J5.11 P11.9 R69.1 | length 1316.3
  Top Layer w10: P11.9@-24873.59,-42638.88 -24873.59,-42416.59 -24799,-42342 -24799,-41866.84 -24634.15,-41701.99 J5.11@-24588.52,-41701.99
  Bottom Layer w10: R69.1@-24998,-42455.8 -24998,-42477 -24873.59,-42601.41 P11.9@-24873.59,-42638.88
EN_R: J5.5 U1.37 | length 1415.8
  Top Layer w10: J5.5@-24334.58,-41751.99 v1(-24262,-41752) ; v1(-23474,-41734) -23474,-41432.32 -23425,-41383.32 U1.37@-23248.24,-41383.32
  Bottom Layer w10: v1(-24262,-41752) -23492,-41752 v1(-23474,-41734)
ENCO_A_L: P9.5 U1.23 | length 2484.7
  Top Layer w10: P9.5@-24013.4,-42756.92 -23975.92,-42756.92 -23948,-42729 -23948,-42548 v1(-23921,-42521) ; v1(-23761,-42521) -23722,-42521 -23669,-42468 -23669,-41207 -23495,-41033 -23169,-41033 -23147.85,-41054.15 U1.23@-23147.85,-41105.76
  Bottom Layer w10: v1(-23921,-42521) v1(-23761,-42521)
ENCO_A_R: P9.11 U1.63 | length 1940.4
  Top Layer w10: P9.11@-24013.4,-42638.81 -24013.4,-42576.4 -23965,-42528 v1(-23965,-42014) ; v1(-23012,-41995.67) -22987.67,-41995.67 -22951,-41959 U1.63@-22951,-41700.24
  Bottom Layer w10: v1(-23965,-42014) -23946.67,-41995.67 v1(-23012,-41995.67)
ENCO_B_L: P9.6 U1.24 | length 2617.6
  Top Layer w10: v1(-23761,-42558) -23683,-42558 -23642,-42517 -23642,-41204.04 -23487.96,-41050 -23178.34,-41050 -23167.54,-41060.81 U1.24@-23167.54,-41105.76 ; v1@-23761,-42557 -23697,-42557
  Bottom Layer w10: P9.6@-24131.51,-42756.92 -24074,-42699.41 -24074,-42590 -24042,-42558 v1(-23761,-42558)
ENCO_B_R: P9.12 U1.64 | length 2027.5
  Top Layer w10: P9.12@-24131.51,-42638.81 -24131.51,-42565.51 -24000,-42434 v1(-24000,-42059) ; v1(-23012,-42045) -22989.32,-42045 -22931.32,-41987 U1.64@-22931.32,-41700.24
  Bottom Layer w10: v1(-24000,-42059) -23986,-42045 v1(-23012,-42045) v1@-23004,-42045
ENCO_Z_L: P9.4 U1.61 | length 1872.6
  Top Layer w10: P9.4@-23895.29,-42756.92 -23836,-42697.63 -23836,-42025 -23790,-41979 v1(-23790,-41922) ; v1(-23012,-41897) -22990.37,-41875.37 U1.61@-22990.37,-41700.24
  Bottom Layer w10: v1(-23790,-41922) -23037,-41922 v1(-23012,-41897)
ENCO_Z_R: P9.10 U1.62 | length 1816.4
  Top Layer w10: P9.10@-23895.29,-42638.81 -23879,-42622.52 -23879,-41978 v1(-23867,-41966) ; v1(-23012,-41946.33) -23007.33,-41946.33 -22970.68,-41909.68 U1.62@-22970.68,-41700.24
  Bottom Layer w10: v1(-23867,-41966) -23848,-41947 v1@-23013,-41947 ; v1(-23012,-41946.33) -23012.67,-41947 v1@-23013,-41947 ; v1@-23011,-41945 v1@-23013,-41947
FR_L: J4.7 U1.40 | length 1668.5
  Top Layer w10: J4.7@-24339.58,-42095.99 v1(-24265.98,-42096) ; v1(-23402,-42076) -23316.5,-41990.5 -23316.5,-41467.5 -23291.37,-41442.37 U1.40@-23248.24,-41442.37
  Bottom Layer w10: v1(-24265.98,-42096) -23422,-42096 v1(-23402,-42076)
FR_OUT_L: J4.9 P11.4 R74.1 | length 1858.4
  Top Layer w10: P11.4@-24991.7,-42756.99 -24899.7,-42848.99 -24544.51,-42848.99 -24465.55,-42770.03 -24465.55,-42128.99 -24548.55,-42045.99 J4.9@-24593.52,-42045.99
  Bottom Layer w10: R74.1@-25259,-42455.8 -25158.8,-42556 -25080,-42556 -25049,-42587 -25049,-42699.69 P11.4@-24991.7,-42756.99
FR_OUT_R: J5.9 P11.10 R75.1 | length 1522.9
  Top Layer w10: P11.10@-24991.7,-42638.88 -24991.7,-42490.7 -24823,-42322 -24823,-41798 -24626.99,-41601.99 J5.9@-24588.52,-41601.99
  Bottom Layer w10: R75.1@-25172,-42455.8 -25172,-42493 -25134,-42531 -25068,-42531 -24991.7,-42607.3 P11.10@-24991.7,-42638.88
FR_R: J5.7 U1.39 | length 1287.4
  Top Layer w10: J5.7@-24334.58,-41651.99 v1(-24262,-41652) ; v1(-23383,-41436) -23369.68,-41422.68 U1.39@-23248.24,-41422.68
  Bottom Layer w10: v1(-24262,-41652) -23418,-41652 -23383,-41617 v1(-23383,-41436)
IIC2_SCL: U1.47
IIC2_SDA: U1.48
LED_RUN: R12.2 U1.97 | length 1039.5
  Top Layer w10: U1.97@-22653.76,-41225.83 v1(-22501.83,-41225.83) ; v1(-22112,-41010) R12.2@-22112,-40702.4
  Bottom Layer w10: v1(-22501.83,-41225.83) -22155.83,-41225.83 -22112,-41182 v1(-22112,-41010)